# Altium PCB RelayBoard-multi.PcbDoc
Units mm, origin at the board's own origin, x right, y up, seen from the top; angles counter-clockwise.
Board outline 156 x 231 mm, 4 copper layers (Top Layer, Mid-Layer 1, Mid-Layer 2, Bottom Layer); 66 components, 77 nets, 264 pads, 9 vias.
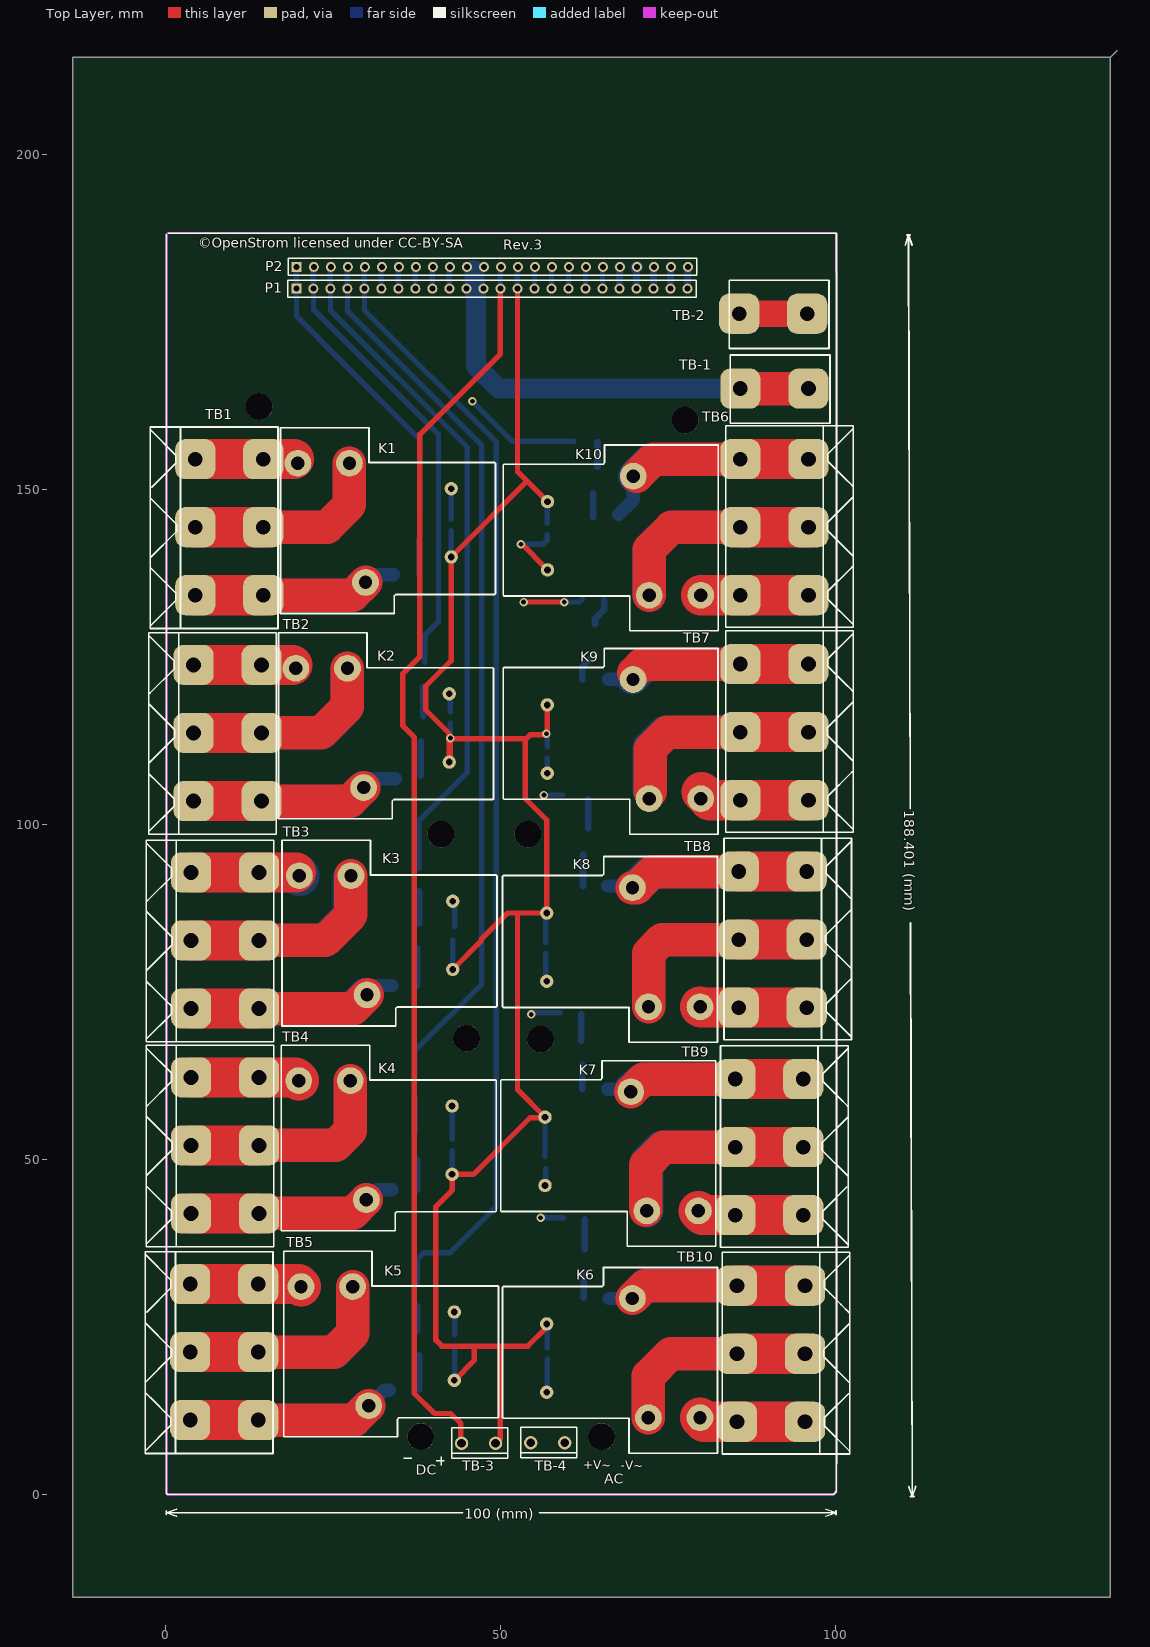
[diagram p0: Top Layer view]
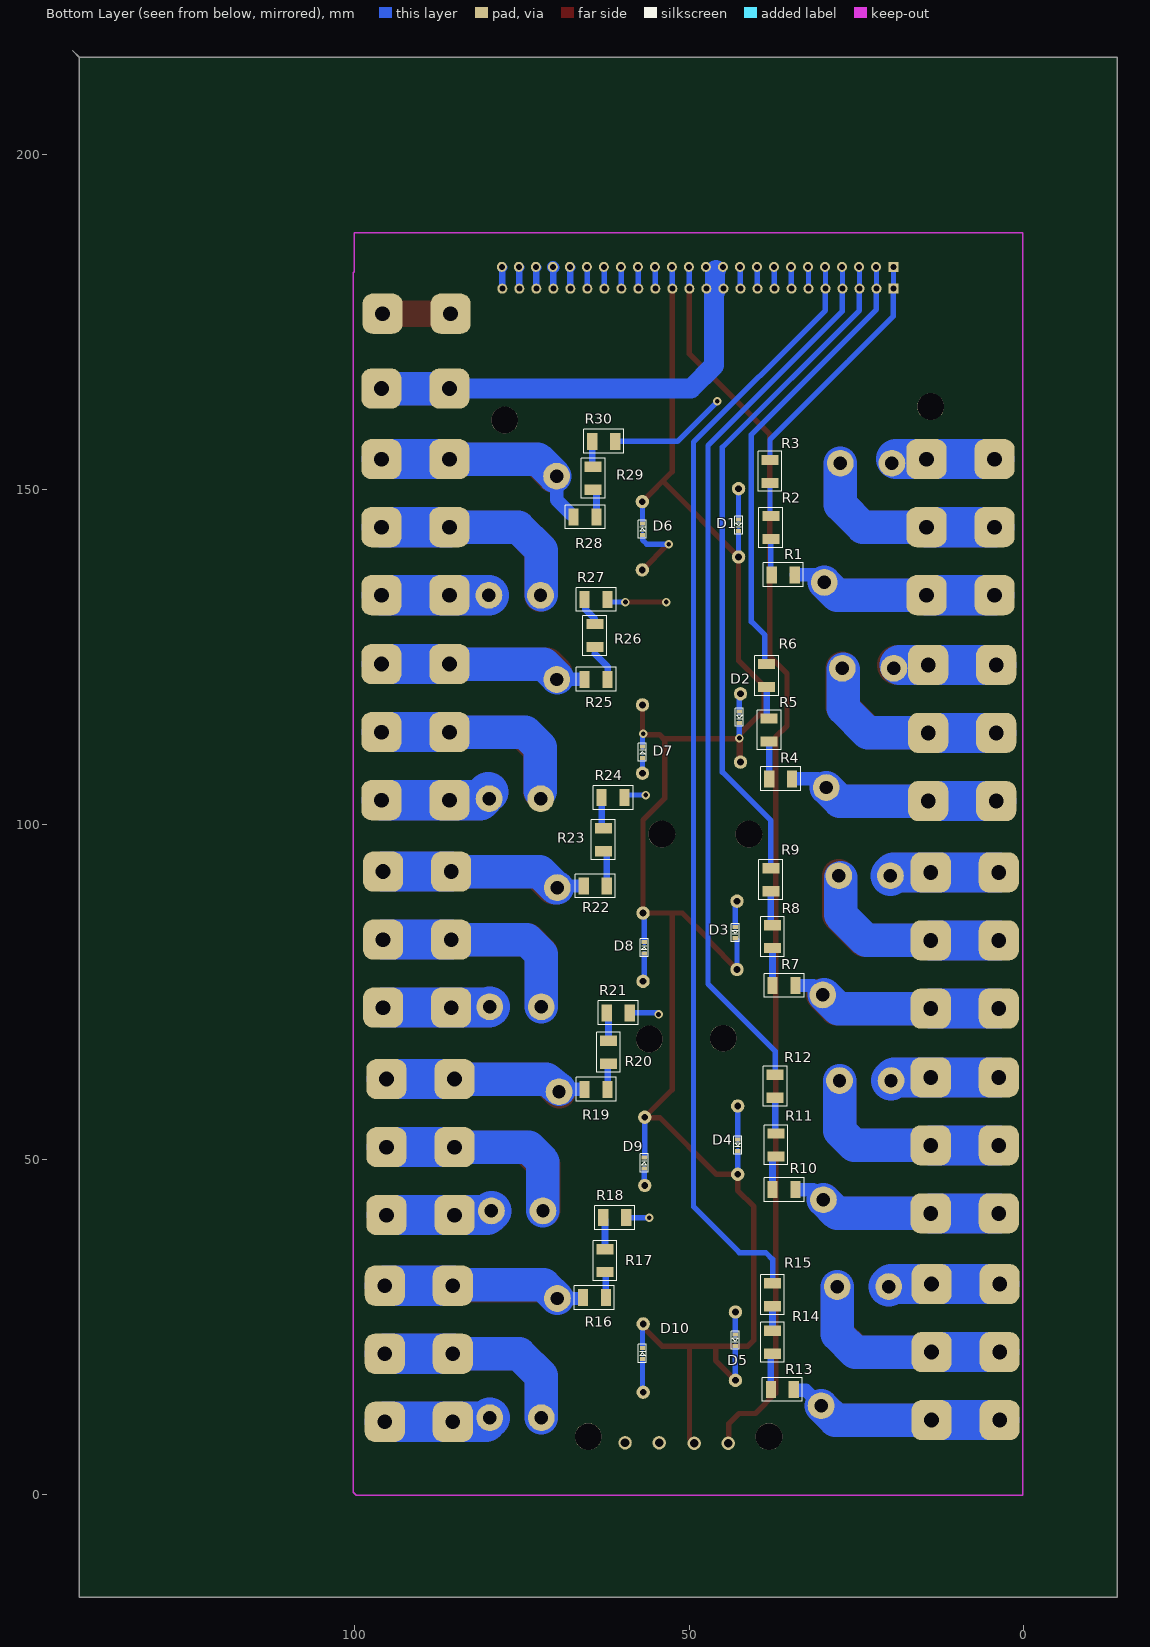
[diagram p1: Bottom Layer view, seen from below]
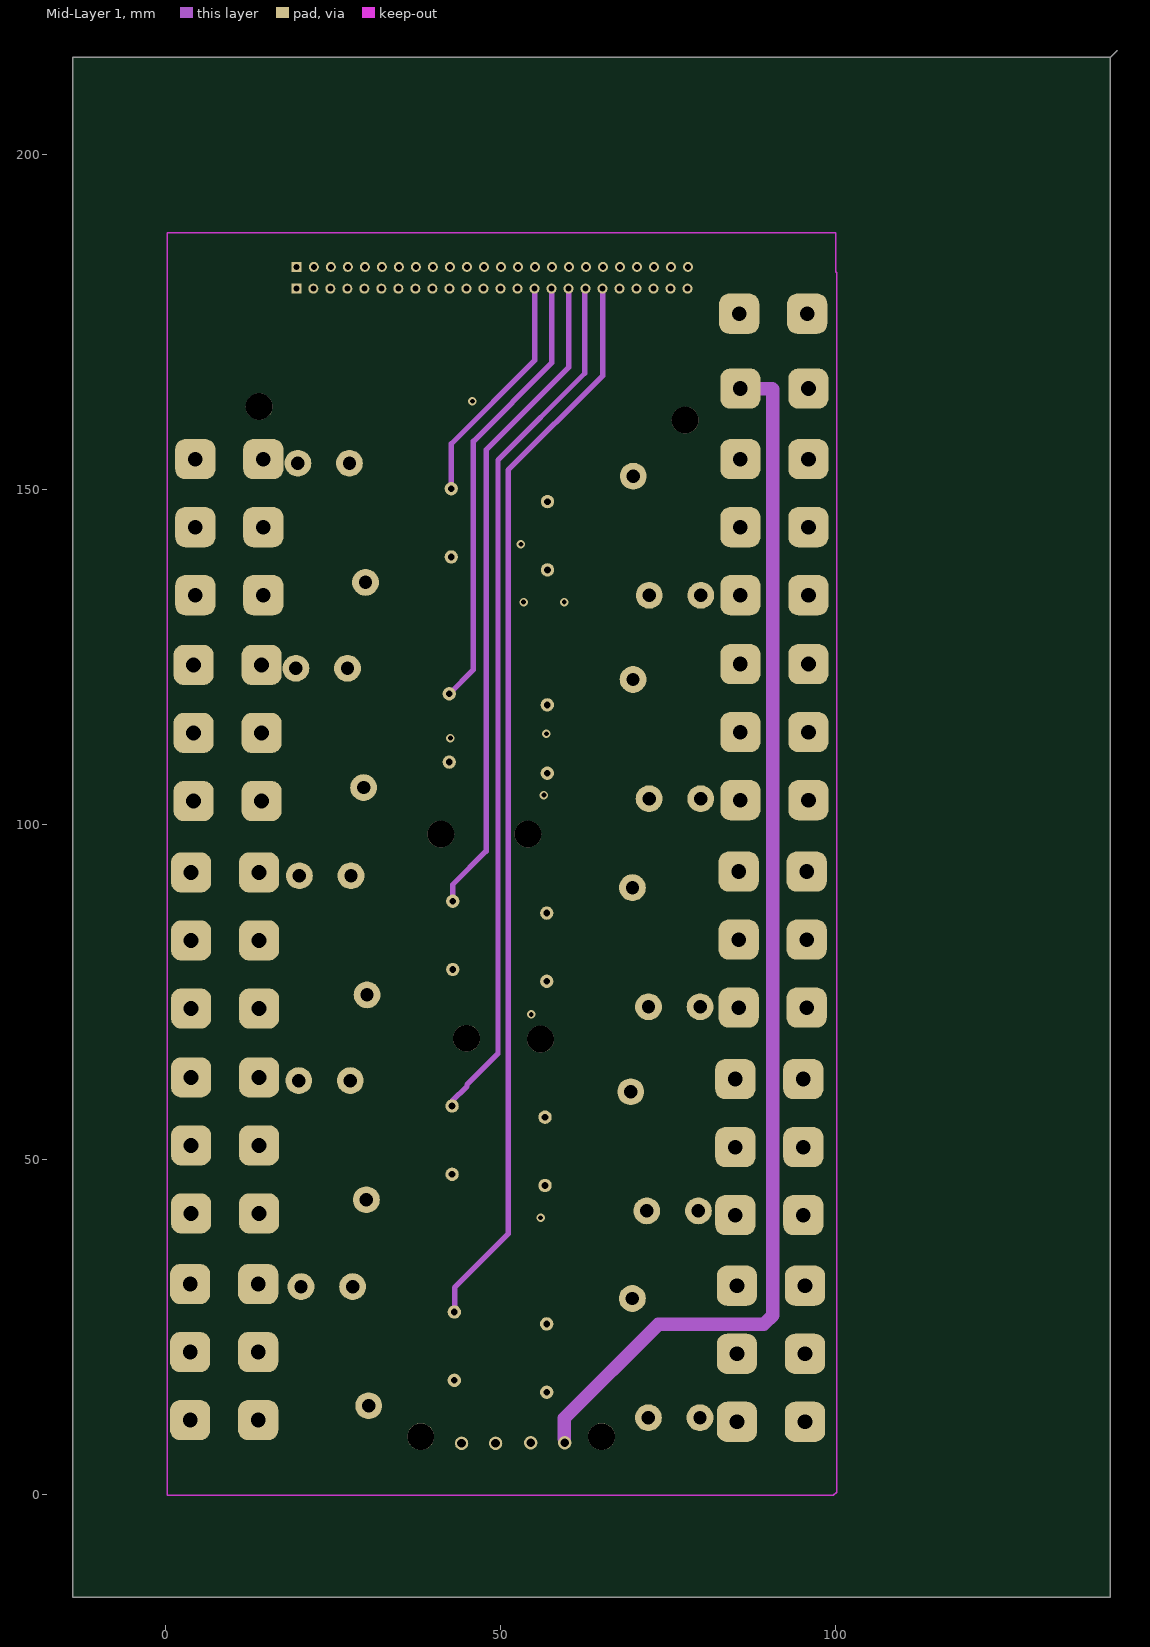
[diagram p2: Mid-Layer 1]
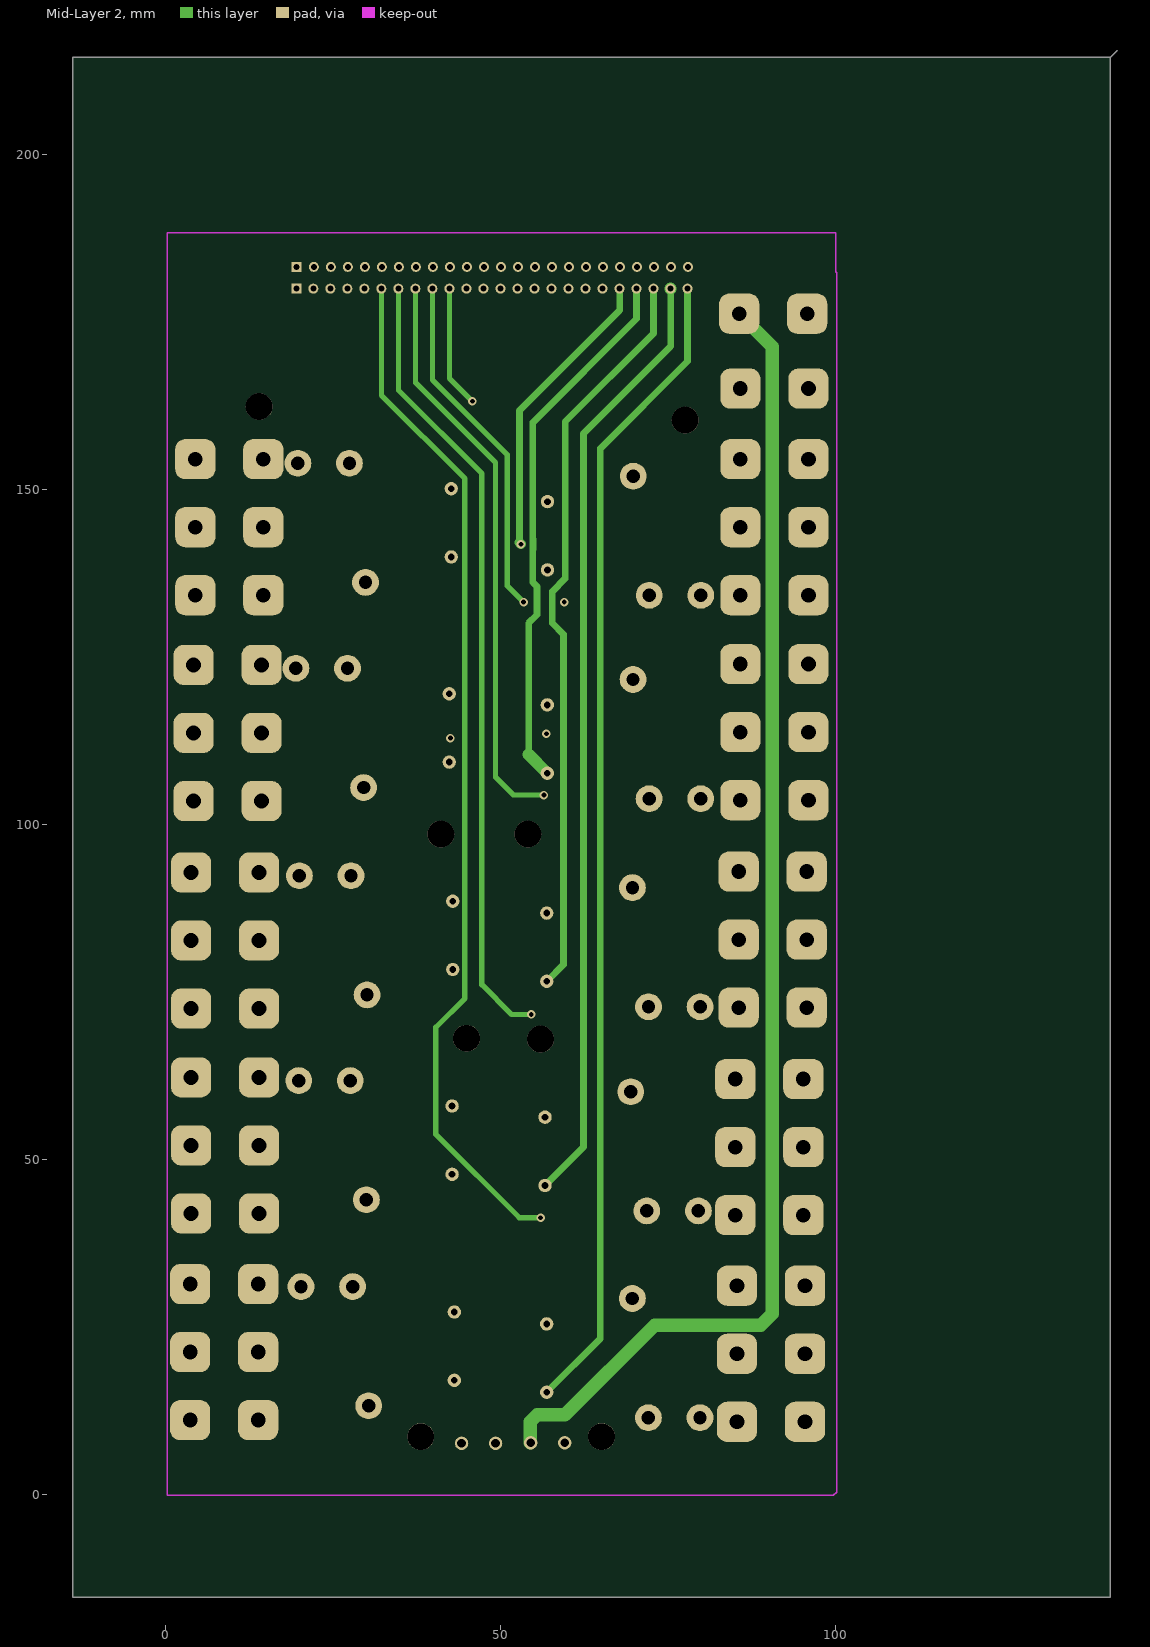
[diagram p3: Mid-Layer 2]

## Layer stack, top to bottom
Top Layer: signal copper 0.0356
Dielectric: core 0.32, FR-4, Dk 4.8
Mid-Layer 1: signal copper 0.0356
Dielectric: prepreg 0.32, FR-4, Dk 4.8
Mid-Layer 2: signal copper 0.0356
Dielectric: core 0.32, FR-4, Dk 4.8
Bottom Layer: signal copper 0.0356

## Board outline
-13.94,-15.414 -13.94,214.586 141.06,214.586 142.06,215.586 141.06,214.586 141.06,-15.414

## Design rules (kind name [scope] priority, off if disabled: settings)
Clearance [All] p1: gap=0.254
PolygonConnect [All] p1: connectstyle=Relief reliefconductorwidth=0.254 reliefentries=4 polygonreliefangle="90 Angle" airgapwidth=0.254
RoutingVias [All] p1: holewidth=0.711 width=1.27 viastyle="Through Hole" minholewidth=0.711 minwidth=1.27 maxholewidth=0.711 maxwidth=1.27
SilkToSilkClearance [All] p1 off: silktosilkclearance=0.254
SilkToSolderMaskClearance [IsPad] p1 off: minsilkscreentomaskgap=0.254 clearancetoexposedcopper=TRUE
SolderMaskExpansion [All] p1: expansion=0.102
Width [All] p1: maxlimit=10 minlimit=0.254 preferedwidth=0.254
26 further rules are at their usual default settings.

## Classes and differential pairs
component class RelayBoard-multi: D1 D2 D3 D4 D5 D6 D7 D8 D9 D10 K1 K2 K3 K4 K5 K6 K7 K8 K9 K10 P1 R1 R2 R3 R4 R5 R6 R7 R8 R9 R10 R11 R12 R13 R14 R15 R16 R17 R18 R19 R20 R21 R22 R23 R24 R25 R26 R27 R28 R29 R30 TB1 TB2 TB3 TB4 TB5 TB6 TB7 TB8 TB9 TB10 TB-1

## Components (designator, comment, footprint, x,y, rotation, side; value= is the part's Value field where it differs from the comment)
D1 "1N4148" SOD523 42.605,143.856 r90 bottom
D2 "1N4148" SOD523 42.478,115.154 r90 bottom
D3 "1N4148" SOD523 43.113,83.023 r90 bottom
D4 "1N4148" SOD523 42.732,51.273 r90 bottom
D5 "1N4148" SOD523 43.113,22.112 r90 bottom
D6 "1N4148" SOD523 56.956,144.97 r270 bottom
D7 "1N4148" SOD523 56.956,111.647 r270 bottom
D8 "1N4148" SOD523 56.702,82.437 r270 bottom
D9 "1N4148" SOD523 56.702,50.306 r270 bottom
D10 "1N4148" SOD523 56.956,21.858 r270 bottom
K1 "Relay-SPDT" "Relay BT90 - duplicate" 29.805,136.168 r90 top
K2 "Relay-SPDT" "Relay BT90 - duplicate" 29.511,105.531 r90 top
K3 "Relay-SPDT" "Relay BT90 - duplicate" 30.032,74.563 r90 top
K4 "Relay-SPDT" "Relay BT90 - duplicate" 29.932,43.966 r90 top
K5 "Relay-SPDT" "Relay BT90 - duplicate" 30.273,13.202 r90 top
K6 "Relay-SPDT" "Relay BT90 - duplicate" 69.656,29.224 r270 top (schematic designator K10)
K7 "Relay-SPDT" "Relay BT90 - duplicate" 69.415,60.105 r270 top (schematic designator K9)
K8 "Relay-SPDT" "Relay BT90 - duplicate" 69.669,90.585 r270 top
K9 "Relay-SPDT" "Relay BT90 - duplicate" 69.756,121.67 r270 top (schematic designator K7)
K10 "Relay-SPDT" "Relay BT90 - duplicate" 69.783,152.033 r270 top (schematic designator K6)
P1 "Header 24" HDR1X24#1 19.47,180.036 r0 top
P2 "Header 24" HDR1X24#2 19.545,183.286 r0 top (schematic designator P1)
R1 "270K/5%/.5" 1210C-GENERIC 37.652,137.301 r180 bottom
R2 "270K/5%/.5" 1210C-GENERIC 37.779,146.064 r270 bottom
R3 "270K/5%/.5" 1210C-GENERIC 37.906,154.446 r270 bottom
R4 "270K/5%/.5" 1210C-GENERIC 38.033,106.821 r180 bottom
R5 "270K/5%/.5" 1210C-GENERIC 38.033,115.838 r270 bottom
R6 "270K/5%/.5" 1210C-GENERIC 38.414,123.966 r270 bottom
R7 "270K/5%/.5" 1210C-GENERIC 37.525,75.96 r180 bottom
R8 "270K/5%/.5" 1210C-GENERIC 37.525,84.977 r270 bottom
R9 "270K/5%/.5" 1210C-GENERIC 37.779,93.486 r270 bottom
R10 "270K/5%/.5" 1210C-GENERIC 37.525,45.48 r180 bottom
R11 "270K/5%/.5" 1210C-GENERIC 37.017,53.862 r270 bottom
R12 "270K/5%/.5" 1210C-GENERIC 37.144,62.625 r270 bottom
R13 "270K/5%/.5" 1210C-GENERIC 37.779,15.635 r180 bottom
R14 "270K/5%/.5" 1210C-GENERIC 37.525,24.398 r270 bottom
R15 "270K/5%/.5" 1210C-GENERIC 37.525,31.51 r270 bottom
R16 "270K/5%/.5" 1210C-GENERIC 62.417,29.351 r0 bottom (schematic designator R28)
R17 "270K/5%/.5" 1210C-GENERIC 62.544,36.59 r270 bottom (schematic designator R29)
R18 "270K/5%/.5" 1210C-GENERIC 59.369,41.289 r0 bottom (schematic designator R30)
R19 "270K/5%/.5" 1210C-GENERIC 62.163,60.466 r0 bottom (schematic designator R25)
R20 "270K/5%/.5" 1210C-GENERIC 62.036,67.705 r270 bottom (schematic designator R26)
R21 "270K/5%/.5" 1210C-GENERIC 58.861,71.896 r0 bottom (schematic designator R27)
R22 "270K/5%/.5" 1210C-GENERIC 62.29,90.819 r0 bottom
R23 "270K/5%/.5" 1210C-GENERIC 62.798,99.455 r270 bottom
R24 "270K/5%/.5" 1210C-GENERIC 59.623,104.027 r0 bottom
R25 "270K/5%/.5" 1210C-GENERIC 62.163,121.68 r0 bottom (schematic designator R19)
R26 "270K/5%/.5" 1210C-GENERIC 64.068,129.935 r270 bottom (schematic designator R20)
R27 "270K/5%/.5" 1210C-GENERIC 62.163,133.618 r0 bottom (schematic designator R21)
R28 "270K/5%/.5" 1210C-GENERIC 63.814,145.937 r0 bottom (schematic designator R16)
R29 "270K/5%/.5" 1210C-GENERIC 64.322,153.43 r270 bottom (schematic designator R17)
R30 "270K/5%/.5" 1210C-GENERIC 61.02,157.24 r0 bottom (schematic designator R18)
TB1 "DG135-3" DG135-1 4.378,154.573 r270 top
TB2 "DG135-3" DG135-1 4.124,123.839 r270 top
TB3 "DG135-3" DG135-1 3.743,92.851 r270 top
TB4 "DG135-3" DG135-1 3.743,62.244 r270 top
TB5 "DG135-3" DG135-1 3.616,31.383 r270 top
TB6 "DG135-3" DG135-1 95.945,134.253 r90 top
TB7 "DG135-3" DG135-1 95.945,103.646 r90 top
TB8 "DG135-3" DG135-1 95.691,72.658 r90 top
TB9 "DG135-3" DG135-1 95.183,41.67 r90 top
TB10 "DG135-3" DG135-1 95.437,10.809 r90 top
TB-1 "DG135-1" DG135-0 85.785,165.114 r0 top
TB-2 "DG135-1" DG135-0 85.61,176.289 r0 top (schematic designator TB-1)
TB-3 "Comment" "TermBlock 2.54 2P" 44.15,7.6 r0 top
TB-4 "Comment" "TermBlock 2.54 2P" 54.47,7.675 r0 top

## Footprints (in the part's own frame and the unit in brackets; to place one, negate y for a bottom-side part, rotate by r counter-clockwise, add the part's x,y. Pads: shape width x height; smd on the part's side, far side on the other; paste and mask are expansions set on the pad)
1210C-GENERIC [mil]
  rect 60x100 smd: 1(0,0) 2(135,0)
  silkscreen extent -50,-70 185,70, body extent -10,-50 145,50, height 46
DG135-0 [mm]
  rrect50% 6x6 hole 2.2: 1(0,0) 2(10.16,0)
  silkscreen extent -1.5,-5.2 13.4,5
DG135-1 [mm]
  rrect50% 6x6 hole 2.2: 1(0,10.16) 1(0,0) 2(10.16,10.16) 2(10.16,0) 3(20.32,10.16) 3(20.32,0)
  silkscreen extent -4.8,-6.7 25.3,12.36
HDR1X24#1 [mm] "Connector; Header; 24 Position"
  rect 1.5x1.5 hole 0.9: 1(0,0)
  round 1.5 hole 0.9: 2(2.54,0) 3(5.08,0) 4(7.62,0) 5(10.16,0) 6(12.7,0) 7(15.24,0) 8(17.78,0) 9(20.32,0) 10(22.86,0) 11(25.4,0) 12(27.94,0) 13(30.48,0) 14(33.02,0) 15(35.56,0) 16(38.1,0) 17(40.64,0) 18(43.18,0) 19(45.72,0) 20(48.26,0) 21(50.8,0) 22(53.34,0) 23(55.88,0) 24(58.42,0)
  silkscreen extent -1.27,-1.27 59.69,1.27
HDR1X24#2 [mm] "Connector; Header; 24 Position"
  rect 1.5x1.5 hole 0.9: 1(-0.075,0)
  round 1.5 hole 0.9: 2(2.54,0) 3(5.08,0) 4(7.62,0) 5(10.16,0) 6(12.7,0) 7(15.24,0) 8(17.78,0) 9(20.32,0) 10(22.86,0) 11(25.4,0) 12(27.94,0) 13(30.48,0) 14(33.02,0) 15(35.56,0) 16(38.1,0) 17(40.64,0) 18(43.18,0) 19(45.72,0) 20(48.26,0) 21(50.8,0) 22(53.34,0) 23(55.88,0) 24(58.42,0)
  silkscreen extent -1.27,-1.27 59.69,1.27
"Relay BT90 - duplicate" [mm]
  round 2 hole 1: 1(3.8,-12.8) 2(14,-12.8)
  round 4 hole 2: 3(17.8,10.1) 4(0,0) 5(17.8,2.4)
  round 0 all layers, no hole: 6(8.9,-15.2)
  silkscreen extent -4.64,-19.4 23.1,12.7
SOD523 [mm]
  rect 0.6x0.8 smd: A(1.7,0) K(0,0)
  silkscreen extent -0.5,-0.6 2.2,0.6, body extent -0.05,-0.53 1.75,0.55, height 0.53
"TermBlock 2.54 2P" [mm]
  round 2 hole 1.3: 1(0,0) 2(5.08,0)
  silkscreen extent -1.5,-2.2 6.9,2.3

## Part data
D1 D2 D3 D5 D6 D7 D8 D9 D10: library part 1N4001, "1N4001"
D4: library part 1N4001
K1 K2 K3 K4 K5 K6 K7 K8 K9 K10: "Single-Pole Dual-Throw Relay"
P1 P2: "Header, 24-Pin"
R1 R2 R3 R4 R5 R6 R7 R8 R9 R10 R11 R12 R13 R14 R15 R16 R17 R18 R19 R20 R21 R22 R23 R24 R25 R26 R27 R28 R29 R30: library part Res3, "Resistor"
TB1 TB2 TB3 TB4 TB5 TB6 TB7 TB8 TB9 TB10: library part "Header 3", "Header, 3-Pin"
TB-1 TB-2: library part Socket, "Socket"

## Free pads (board coordinates)
  round 4 hole 4: 2(13.917,162.425) 2(38.06,8.586) 2(41.06,98.586) 2(44.891,68.086) 2(54.06,98.586) 2(55.94,67.959) 2(65.06,8.586) 2(77.53,160.415)

## Via types
v1: diameter 1.27, hole 0.711, Top Layer to Bottom Layer, 9 vias

## Nets (pads, with @x,y where several pads share a name; then routed paths per layer and width w, separated by ;. In a path a pad name is that pad's centre, name@x,y a point inside that pad or via, vN(x,y) a via of type N, cw(c..) or ccw(c..) an arc to the next point about the centre after c; other vN are vias at no path point)
GND: P1.13 P2.13 TB-3.1 | length 186.8
  Top Layer w0.8: TB-3.1@44.045,7.6 44.045,10.53 42.525,12.05 40.1,12.05 37.075,15.075 37.075,113.05 35.375,114.75 35.375,122.55 37.925,125.1 37.925,158.275 49.95,170.3 P1.13
  Bottom Layer w0.8: P1.13 49.95,183.211 P2.13
Net3: K9.4 R25.2 TB7.3 | length 58.7
  Top Layer w5: K9.4@69.883,122.686 71.163,123.966 TB7.3@85.785,123.966
  Top Layer w6: TB7.3@85.785,123.966 TB7.3@95.945,123.966
  Bottom Layer w2: R25.2@66.1,121.68 69.746,121.68 K9.4 ; K9.4@68.386,121.934 K9.4@69.656,121.934
  Bottom Layer w5: K9.4@69.656,121.934 71.688,123.966 TB7.3@85.785,123.966
  Bottom Layer w6: TB7.3@85.785,123.966 TB7.3@95.945,123.966
Net4: K9.3 TB7.1 | length 33
  Top Layer w6: K9.3@79.983,104.886 81.223,103.646 85.785,103.646 TB7.1@95.945,103.646
  Bottom Layer w6: K9.3@79.983,104.886 81.223,103.646 85.785,103.646 TB7.1@95.945,103.646
Net5: R26.1 R27.2 | length 4.1
  Bottom Layer w1: R26.1 64.068,130.697 65.465,132.094 R27.2@65.465,133.491
NetD1_A: D1.A K1.2 P1.15 P2.15 | length 43.3
  Top Layer w0.8: K1.2@42.351,149.914 K1.2
  Mid-Layer 1 w0.8: K1.2 42.605,156.859 55.051,169.305 55.051,180.015 P1.15
  Bottom Layer w0.8: D1.A K1.2 ; P1.15 55.03,183.211 P2.15
NetD1_K: D1.K D2.K D3.K D4.K D5.K D6.K D7.K D8.K D9.K D10.K K1.1 K2.1 K3.1 K4.1 K5.1 K6.1 K7.1 K8.1 K9.1 K10.1 P1.14 P2.14 TB-3.2 | length 310.4
  Top Layer w0.8: K2.1 42.311,113.585 38.795,117.101 38.795,120.664 42.605,124.474 K1.1 ; K1.1@42.351,140.222 K1.1 ; K2.1@42.478,109.498 v1@42.478,112.839 ; v1(42.478,112.917) v1@42.478,112.839 ; K3.1 47.05,82.581 ; K5.1 46.034,19.963 46.034,22.112 ; 43.073,22.072 43.113,22.112 ; 47.05,82.818 51.017,86.785 52.511,86.785 ; TB-3.2@49.925,8.295 49.925,22.112 ; P1.14 52.511,180.015 52.511,152.705 K10.1 ; v1@56.829,113.425 54.416,113.425 53.83,112.839 ; K6.1@56.956,25.033 54.035,22.112 49.925,22.112 ; v1@56.956,113.552 K9.1 ; K10.1@56.956,148.206 K10.1 ; v1@42.478,112.839 53.83,112.839 ; K1.1 53.927,151.29 K10.1 ; 43.113,22.112 41.208,22.112 40.319,23.001 40.319,42.94 42.732,45.353 K4.1 45.907,47.766 54.359,56.218 56.702,56.218 52.511,60.409 52.511,86.785 ; 43.113,22.112 46.034,22.112 ; 46.034,22.112 49.925,22.112 ; 52.511,86.785 K8.1 56.869,100.685 53.654,103.9 53.654,112.663 53.83,112.839
  Bottom Layer w0.8: v1(42.478,112.917) D2.K ; K1.1 D1.K ; K4.1 D4.K ; K3.1 D3.K@42.832,82.742 ; K5.1@43.113,17.042 D5.K ; P1.14 52.49,183.211 P2.14 ; D9.K@56.615,50.393 K7.1 ; D8.K K8.1@56.702,86.618 ; v1(56.829,113.552) 56.956,113.425 D7.K ; D10.K K6.1@56.956,25.324 ; D6.K K10.1@56.956,148.206
NetD2_A: D2.A K2.2 P1.16 P2.16 | length 72.7
  Top Layer w0.8: K2.2 K2.2@42.351,119.491
  Mid-Layer 1 w0.8: K2.2 45.907,123.127 45.907,157.24 57.591,168.924 57.591,180.015 P1.16
  Bottom Layer w0.8: D2.A K2.2@42.478,119.364 ; P1.16 57.57,183.211 P2.16
NetD3_A: D3.A K3.2 P1.17 P2.17 | length 105.7
  Top Layer w0.8: K3.2 K3.2@42.986,88.409
  Mid-Layer 1 w0.8: K3.2 42.832,91.046 47.812,96.026 47.812,155.97 60.131,168.289 60.131,180.015 P1.17
  Bottom Layer w0.8: D3.A K3.2@43.113,88.282 ; P1.17 60.11,183.211 P2.17
NetD4_A: D4.A K4.2 P1.18 P2.18 | length 138.8
  Top Layer w0.8: K4.2@42.605,57.839 K4.2
  Mid-Layer 1 w0.8: K4.2 42.732,58.688 44.954,60.911 44.954,61.165 49.59,65.8 49.59,154.446 62.544,167.4 62.544,179.93 P1.18
  Bottom Layer w0.8: D4.A K4.2 ; P1.18 62.65,183.211 P2.18
NetD5_A: D5.A K5.2 P1.19 P2.19 | length 168.7
  Top Layer w0.8: K5.2 K5.2@43.113,27.162
  Mid-Layer 1 w0.8: K5.2 43.113,27.242 43.113,30.875 51.114,38.876 51.114,152.922 65.211,167.019 65.211,180.015 P1.19
  Bottom Layer w0.8: D5.A K5.2@43.113,27.162 ; P1.19 65.19,183.211 P2.19
NetD6_A: D6.A K10.2 P1.20 P2.20 | length 58.3
  Top Layer w0.8: v1(53.019,141.873) 53.143,141.873 K10.2
  Mid-Layer 2 w0.8: P1.20 P1.20@67.751,180.015
  Mid-Layer 2 w1: v1@52.8,142.092 52.8,161.847 67.751,176.798 P1.20@67.751,180.015
  Mid-Layer 2 w1.5: v1@52.8,142.092 v1(53.019,141.873)
  Bottom Layer w0.8: v1(53.019,141.873) 56.321,141.873 56.956,142.508 D6.A
  Bottom Layer w1: P1.20 P2.20@67.73,183.211
  Bottom Layer w1.5: P2.20@67.73,183.211 P2.20
NetD7_A: D7.A K9.2 P1.21 P2.21 | length 86.2
  Mid-Layer 2 w1: 54.162,110.464 54.162,130.084 55.41,131.332 55.41,135.561 54.835,136.136 ; 54.797,136.174 54.797,141.121 ; 54.797,142.625 54.797,160.072 70.27,175.545 P1.21 ; 54.808,141.132 54.808,142.614
  Mid-Layer 2 w1.8: 54.162,110.464 K9.2
  Bottom Layer w0.8: K9.2 D7.A
  Bottom Layer w1: P1.21 P2.21@70.27,183.211
  Bottom Layer w1.8: P2.21@70.27,183.211 P2.21
NetD8_A: D8.A K8.2 P1.22 P2.22 | length 118.8
  Top Layer w0.8: K8.2@56.829,76.625 K8.2
  Mid-Layer 2 w1: K8.2 59.369,79.085 59.369,128.411 57.707,130.073 57.707,134.807 59.623,136.723 59.623,160.161 72.81,173.348 P1.22
  Bottom Layer w0.8: K8.2@56.702,76.752 D8.A
  Bottom Layer w1: P1.22 P2.22@72.81,183.211
  Bottom Layer w1.5: P2.22@72.81,183.211 P2.22
NetD9_A: D9.A K7.2 P1.23 P2.23 | length 147.5
  Mid-Layer 2 w1: K7.2 62.35,51.84 62.35,158.4 75.371,171.421 P1.23@75.371,180.015
  Mid-Layer 2 w1.8: P1.23 P1.23@75.371,180.015
  Bottom Layer w0.8: K7.2 56.702,46.192 D9.A
  Bottom Layer w1: P1.23 P2.23@75.35,183.211
  Bottom Layer w1.5: P2.23@75.35,183.211 P2.23
NetD10_A: D10.A K6.2 P1.24 P2.24 | length 181.8
  Top Layer w0.8: K6.2 K6.2@56.956,15.324
  Mid-Layer 2 w1: K6.2 64.875,23.243 64.875,156.175 77.89,169.19 P1.24
  Bottom Layer w0.8: K6.2@56.956,15.324 D10.A
  Bottom Layer w1: P1.24 P2.24@77.89,183.211
  Bottom Layer w1.5: P2.24@77.89,183.211 P2.24
NetK1_3: K1.3 TB1.1 | length 29.4
  Top Layer w6: TB1.1@4.378,154.573 14.538,154.573 K1.3@19.1,154.573
  Bottom Layer w6: TB1.1@4.378,154.573 14.538,154.573 K1.3@19.1,154.573
NetK1_4: K1.4 R1.2 TB1.3 | length 55.5
  Top Layer w5: TB1.3@14.538,134.253 27.89,134.253 K1.4
  Top Layer w6: TB1.3@4.378,134.253 TB1.3@14.538,134.253
  Bottom Layer w2: K1.4@30.938,137.301 R1.2@33.969,137.301
  Bottom Layer w5: TB1.3@14.538,134.253 27.89,134.253 K1.4
  Bottom Layer w6: TB1.3@4.378,134.253 TB1.3@14.538,134.253
NetK1_5: K1.5 TB1.2 | length 61.2
  Top Layer w5: TB1.2@14.538,144.413 24.063,144.413 27.405,147.755 K1.5
  Top Layer w6: TB1.2@4.378,144.413 TB1.2@14.538,144.413
  Bottom Layer w5: TB1.2@14.538,144.413 24.063,144.413 27.405,147.755 K1.5
  Bottom Layer w6: TB1.2@4.378,144.413 TB1.2@14.538,144.413
NetK2_3: K2.3 TB2.1 | length 29.2
  Top Layer w6: TB2.1@4.124,123.839 14.284,123.839 K2.3@18.903,123.839
  Bottom Layer w6: TB2.1@4.124,123.839 14.284,123.839 K2.3@18.555,123.839
NetK2_4: K2.4 R4.2 TB2.3 | length 57.7
  Top Layer w5: TB2.3@14.284,103.519 27.499,103.519 K2.4
  Top Layer w6: TB2.3@4.124,103.519 TB2.3@14.284,103.519
  Bottom Layer w1: K2.4 K2.4@30.801,106.821
  Bottom Layer w2: K2.4@30.801,106.821 R4.2@34.223,106.821
  Bottom Layer w5: TB2.3@14.284,103.519 27.499,103.519 K2.4
  Bottom Layer w6: TB2.3@4.124,103.519 TB2.3@14.284,103.519
NetK2_5: K2.5 TB2.2 | length 60.6
  Top Layer w5: TB2.2@14.284,113.679 23.174,113.679 27.111,117.616 K2.5
  Top Layer w6: TB2.2@4.124,113.679 TB2.2@14.284,113.679
  Bottom Layer w5: TB2.2@14.284,113.679 23.301,113.679 26.984,117.362 K2.5@26.984,123.204
  Bottom Layer w6: TB2.2@4.124,113.679 TB2.2@14.284,113.679
NetK3_3: K3.3 TB3.1 | length 32.1
  Top Layer w6: TB3.1@3.743,92.851 13.903,92.851 K3.3@19.444,92.851
  Bottom Layer w6: TB3.1@3.743,92.851 13.903,92.851 19.444,92.851 K3.3
NetK3_4: K3.4 R7.2 TB3.3 | length 58.3
  Top Layer w5: TB3.3@13.903,72.531 28,72.531 K3.4
  Top Layer w6: TB3.3@3.743,72.531 TB3.3@13.903,72.531
  Bottom Layer w1: K3.4 K3.4@31.429,75.96
  Bottom Layer w2: K3.4@31.429,75.96 R7.2@33.715,75.96
  Bottom Layer w5: TB3.3@13.903,72.531 27.746,72.531 K3.4@29.778,74.563
  Bottom Layer w6: TB3.3@3.743,72.531 TB3.3@13.903,72.531
NetK3_5: K3.5 TB3.2 | length 62.1
  Top Layer w5: TB3.2@13.903,82.691 23.809,82.691 27.632,86.514 K3.5
  Top Layer w6: TB3.2@3.743,82.691 TB3.2@13.903,82.691
  Bottom Layer w5: TB3.2@13.903,82.691 23.555,82.691 27.365,86.501 K3.5@27.365,92.096
  Bottom Layer w6: TB3.2@3.743,82.691 TB3.2@13.903,82.691
NetK4_3: K4.3 TB4.1 | length 32.6
  Top Layer w6: TB4.1@3.743,62.244 13.903,62.244 19.354,62.244 K4.3
  Bottom Layer w6: TB4.1@3.743,62.244 13.903,62.244 19.354,62.244 K4.3
NetK4_4: K4.4 R10.2 TB4.3 | length 58.5
  Top Layer w5: TB4.3@13.903,41.924 27.873,41.924 29.915,43.966 K4.4
  Top Layer w6: TB4.3@3.743,41.924 TB4.3@13.903,41.924
  Bottom Layer w1: K4.4 31.446,45.48
  Bottom Layer w2: 31.446,45.48 R10.2@33.715,45.48
  Bottom Layer w5: TB4.3@13.903,41.924 27.89,41.924 K4.4
  Bottom Layer w6: TB4.3@3.743,41.924 TB4.3@13.903,41.924
NetK4_5: K4.5 TB4.2 | length 64.4
  Top Layer w4.2: K4.5@27.492,61.726 K4.5
  Top Layer w5: TB4.2@13.903,52.084 25.333,52.084 27.492,54.243 K4.5@27.492,61.726
  Top Layer w6: TB4.2@3.743,52.084 TB4.2@13.903,52.084
  Bottom Layer w4.2: K4.5@27.492,61.726 K4.5
  Bottom Layer w5: TB4.2@13.903,52.084 25.333,52.084 27.492,54.243 K4.5@27.492,61.726
  Bottom Layer w6: TB4.2@3.743,52.084 TB4.2@13.903,52.084
NetK5_3: K5.3 TB5.1 | length 33.4
  Top Layer w6: TB5.1@3.616,31.383 13.776,31.383 19.792,31.383 K5.3
  Bottom Layer w6: TB5.1@3.616,31.383 13.776,31.383 19.792,31.383 K5.3
NetK5_4: K5.4 R13.2 TB5.3 | length 59.1
  Top Layer w5: TB5.3@13.776,11.063 28.134,11.063 K5.4
  Top Layer w6: TB5.3@3.616,11.063 TB5.3@13.776,11.063
  Bottom Layer w2: K5.4 32.579,15.508 33.334,15.508
  Bottom Layer w5: TB5.3@13.776,11.063 28.134,11.063 K5.4
  Bottom Layer w6: TB5.3@3.616,11.063 TB5.3@13.776,11.063
NetK5_5: K5.5 TB5.2 | length 64.9
  Top Layer w5: TB5.2@13.776,21.223 25.079,21.223 27.873,24.017 K5.5
  Top Layer w6: TB5.2@3.616,21.223 TB5.2@13.776,21.223
  Bottom Layer w5: TB5.2@13.776,21.223 25.206,21.223 27.873,23.89 K5.5
  Bottom Layer w6: TB5.2@3.616,21.223 TB5.2@13.776,21.223
NetK6_3: K10.3 TB6.1 | length 32.1
  Top Layer w6: K10.3@79.903,134.253 85.785,134.253 TB6.1@95.945,134.253
  Bottom Layer w6: K10.3 79.903,134.253 85.785,134.253 TB6.1@95.945,134.253
NetK6_4: K10.4 R28.2 TB6.3 | length 60.3
  Top Layer w5: K10.4@70.291,152.033 72.831,154.573 TB6.3@85.785,154.573
  Top Layer w6: TB6.3@85.785,154.573 TB6.3@95.945,154.573
  Bottom Layer w2: R28.2@67.624,146.318 69.783,148.477 K10.4
  Bottom Layer w5: K10.4@70.037,152.033 72.577,154.573 TB6.3@85.785,154.573
  Bottom Layer w6: TB6.3@85.785,154.573 TB6.3@95.945,154.573
NetK6_5: K10.5 TB6.2 | length 64.1
  Top Layer w5: K10.5 72.183,141.098 75.498,144.413 TB6.2@85.785,144.413
  Top Layer w6: TB6.2@85.785,144.413 TB6.2@95.945,144.413
  Bottom Layer w4.2: K10.5@72.069,134.347 K10.5
  Bottom Layer w5: K10.5@72.069,134.347 72.069,140.984 75.498,144.413 TB6.2@85.785,144.413
  Bottom Layer w6: TB6.2@85.785,144.413 TB6.2@95.945,144.413
NetK7_5: K9.5 TB7.2 | length 62.4
  Top Layer w4.2: K9.5@72.283,104.886 K9.5@72.323,104.926
  Top Layer w5: K9.5@72.323,104.926 72.323,111.266 74.863,113.806 TB7.2@85.785,113.806
  Top Layer w6: TB7.2@85.785,113.806 TB7.2@95.945,113.806
  Bottom Layer w4.2: K9.5@72.196,104.973 K9.5@72.283,104.886
  Bottom Layer w5: K9.5@72.196,104.973 72.196,111.52 74.482,113.806 TB7.2@85.785,113.806
  Bottom Layer w6: TB7.2@85.785,113.806 TB7.2@95.945,113.806
NetK8_3: K8.3 TB8.1 | length 31.9
  Top Layer w6: K8.3 79.896,72.658 85.531,72.658 TB8.1@95.691,72.658
  Bottom Layer w6: K8.3 79.896,72.658 85.531,72.658 TB8.1@95.691,72.658
NetK8_4: K8.4 R22.2 TB8.3 | length 57.5
  Top Layer w5: K8.4 70.311,90.585 72.704,92.978 TB8.3@85.531,92.978
  Top Layer w6: TB8.3@85.531,92.978 TB8.3@95.691,92.978
  Bottom Layer w2: R22.2@65.973,90.819 K8.4@69.435,90.819
  Bottom Layer w5: K8.4 69.93,90.585 72.323,92.978 TB8.3@85.531,92.978
  Bottom Layer w6: TB8.3@85.531,92.978 TB8.3@95.691,92.978
NetK8_5: K8.5 TB8.2 | length 64.9
  Top Layer w5: K8.5 72.069,80.786 74.101,82.818 TB8.2@85.531,82.818
  Top Layer w6: TB8.2@85.531,82.818 TB8.2@95.691,82.818
  Bottom Layer w5: K8.5 72.069,80.659 74.228,82.818 TB8.2@85.531,82.818
  Bottom Layer w6: TB8.2@85.531,82.818 TB8.2@95.691,82.818
NetK9_3: K7.3 TB9.1 | length 31.9
  Top Layer w6: K7.3 80.15,41.67 85.023,41.67 TB9.1@95.183,41.67
  Bottom Layer w6: K7.3 80.15,41.67 85.023,41.67 TB9.1@95.183,41.67
NetK9_4: K7.4 R19.2 TB9.3 | length 56.3
  Top Layer w5: K7.4 71.3,61.99 TB9.3@85.023,61.99
  Top Layer w6: TB9.3@85.023,61.99 TB9.3@95.183,61.99
  Bottom Layer w2: R19.2@65.953,60.486 K7.4@69.415,60.486
  Bottom Layer w5: K7.4@69.415,60.486 71.3,61.99 TB9.3@85.023,61.99
  Bottom Layer w6: TB9.3@85.023,61.99 TB9.3@95.183,61.99
NetK9_5: K7.5 TB9.2 | length 63.1
  Top Layer w4.2: K7.5@71.688,42.432 K7.5
  Top Layer w5: K7.5@71.688,42.432 71.688,49.163 74.355,51.83 TB9.2@85.023,51.83
  Top Layer w6: TB9.2@85.023,51.83 TB9.2@95.183,51.83
  Bottom Layer w5: K7.5 71.815,49.671 73.974,51.83 TB9.2@85.023,51.83
  Bottom Layer w6: TB9.2@85.023,51.83 TB9.2@95.183,51.83
NetK10_3: K6.3 TB10.1 | length 31.9
  Top Layer w6: K6.3 80.371,10.809 85.277,10.809 TB10.1@95.437,10.809
  Bottom Layer w6: K6.3 80.371,10.809 85.277,10.809 TB10.1@95.437,10.809
NetK10_4: K6.4 R16.2 TB10.3 | length 56.7
  Top Layer w5: K6.4 71.561,31.129 TB10.3@85.277,31.129
  Top Layer w6: TB10.3@85.277,31.129 TB10.3@95.437,31.129
  Bottom Layer w2: R16.2@66.227,29.224 K6.4
  Bottom Layer w5: K6.4 71.688,31.256 85.15,31.256 TB10.3@85.277,31.129
  Bottom Layer w6: TB10.3@85.277,31.129 TB10.3@95.437,31.129
NetK10_5: K6.5 TB10.2 | length 62
  Top Layer w5: K6.5 72.056,17.654 75.371,20.969 TB10.2@85.277,20.969
  Top Layer w6: TB10.2@85.277,20.969 TB10.2@95.437,20.969
  Bottom Layer w5: K6.5 72.056,17.654 75.371,20.969 TB10.2@85.277,20.969
  Bottom Layer w6: TB10.2@85.277,20.969 TB10.2@95.437,20.969
NetP1_1: P1.1 P2.1 R3.1 | length 35.9
  Bottom Layer w0.8: P2.1@19.47,183 P1.1 19.491,180.015 19.491,175.934 26.025,169.4 ; 26.241,169.159 37.906,157.494 R3.1
NetP1_2: P1.2 P2.2 R6.1 | length 67.7
  Bottom Layer w0.8: P2.2 22.01,183.211 P1.2 22.031,180.015 22.031,176.925 40.7,158.256 40.7,130.316 38.668,128.284 R6.1@38.668,124.22
NetP1_3: P1.3 P2.3 R9.1 | length 101.3
  Bottom Layer w0.8: P2.3 24.55,183.211 P1.3 24.571,180.015 24.571,176.798 45.018,156.351 45.018,107.837 37.779,100.598 R9.1
NetP1_4: P1.4 P2.4 R12.1 | length 133.2
  Bottom Layer w0.8: P2.4 27.09,183.211 P1.4 27.111,180.015 27.111,176.671 47.177,156.605 47.177,76.214 37.144,66.181 R12.1
NetP1_5: P1.5 P2.5 R15.1 | length 167.2
  Bottom Layer w0.8: P2.5 29.63,183.211 P1.5 29.651,180.015 29.651,176.798 49.336,157.113 49.336,42.94 42.478,36.082 38.541,36.082 37.525,35.066 R15.1
NetP1_6: P1.6 P2.6 R18.1 | length 160.7
  Mid-Layer 2 w0.8: P1.6 32.191,180.015 32.191,164.098 44.637,151.652 44.637,74.055 40.319,69.737 40.319,53.735 52.765,41.289 v1(55.94,41.289)
  Bottom Layer w0.8: P1.6 32.17,183.211 P2.6 ; v1(55.94,41.289) R18.1
NetP1_7: P1.7 P2.7 R21.1 | length 126
  Mid-Layer 2 w0.8: P1.7 34.731,180.015 34.731,164.86 47.177,152.414 47.177,76.087 51.622,71.642 v1(54.543,71.642)
  Bottom Layer w0.8: P1.7 34.71,183.211 P2.7 ; v1(54.543,71.642) 54.797,71.896 R21.1
NetP1_8: P1.8 P2.8 R24.1 | length 92.3
  Mid-Layer 2 w0.8: P1.8 37.271,180.015 37.271,166.003 49.209,154.065 49.209,107.075 51.876,104.408 v1(56.448,104.408)
  Bottom Layer w0.8: P1.8 37.25,183.211 P2.8 ; v1(56.448,104.408) R24.1@59.242,104.408
NetP1_9: P1.9 P2.9 R27.1 | length 64.6
  Top Layer w0.8: v1(53.4,133.237) v1(59.496,133.237)
  Mid-Layer 2 w0.8: P1.9 39.811,180.015 39.811,166.384 50.987,155.208 50.987,135.65 v1(53.4,133.237)
  Bottom Layer w0.8: P1.9 39.79,183.211 P2.9 ; v1(59.496,133.237) 61.782,133.237 R27.1
NetP1_10: P1.10 P2.10 R30.1 | length 39.1
  Mid-Layer 2 w0.8: P1.10 42.351,180.015 42.351,166.638 v1(45.78,163.209)
  Bottom Layer w0.8: P1.10 42.33,183.211 P2.10 ; v1(45.78,163.209) 51.749,157.24 R30.1@60.893,157.24
NetP1_11: P1.11 P1.12 P2.11 P2.12 TB-1.1 TB-1.2 TB-4.2 | length 259.4
  Top Layer w5: TB-1.1 TB-1.2
  Mid-Layer 1 w2: TB-4.2@59.475,8.275 59.475,11.325 73.55,25.4 89.3,25.4 90.65,26.75 90.65,165.025 90.561,165.114 TB-1.1
  Bottom Layer w3: 46,182.825 46.11,182.715 46.11,179.486 46.288,179.308 46.288,168.543 49.717,165.114 TB-1.1
  Bottom Layer w5: TB-1.1 TB-1.2
NetR1_1: R1.1 R2.2 | length 5.2
  Bottom Layer w0.8: R1.1@37.779,137.428 R2.2
NetR2_1: R2.1 R3.2 | length 4.8
  Bottom Layer w0.8: R2.1@37.906,146.191 R3.2
NetR4_1: R4.1 R5.2 | length 5.1
  Bottom Layer w1: R4.1@38.033,107.329 R5.2
NetR5_1: R5.1 R6.2 | length 4.3
  Bottom Layer w1: R5.1@38.414,116.219 R6.2
NetR7_1: R7.1 R8.2 | length 5.6
  Bottom Layer w1: R7.1 R8.2
NetR8_1: R8.1 R9.2 | length 4.8
  Bottom Layer w1: R8.1@37.779,85.231 R9.2
NetR10_1: R10.1 R11.2 | length 4.4
  Bottom Layer w1: R10.1 R11.2@37.525,49.925
NetR13_1: R13.1 R14.2 | length 5.1
  Bottom Layer w1: R13.1 R14.2@37.779,20.715
NetR14_1: R14.1 R15.2 | length 3.7
  Bottom Layer w1: R14.1 R15.2
NetR16_1: R28.1 R29.2 | length 3.6
  Bottom Layer w1: R28.1 R29.2@63.814,149.493
NetR17_1: R29.1 R30.2 | length 3.7
  Bottom Layer w1: R29.1@64.449,153.43 R30.2@64.449,157.113
NetR19_1: R25.1 R26.2 | length 4.6
  Bottom Layer w1: R25.1 62.163,123.585 64.068,125.49
NetR19_2: 
NetR22_1: R22.1 R23.2 | length 4.7
  Bottom Layer w1: R22.1 R23.2@62.29,95.518
NetR23_1: R23.1 R24.2 | length 4.3
  Bottom Layer w1: R23.1@63.052,99.455 R24.2@63.052,103.773
NetR25_1: R19.1 R20.2 | length 3.7
  Bottom Layer w1: R19.1 R20.2@62.163,64.149
NetR28_1: R16.1 R17.2 | length 3.7
  Bottom Layer w1: R16.1 R17.2@62.417,33.034
NetR28_2: 
NetR29_1: R17.1 R18.2 | length 4.4
  Bottom Layer w1: R17.1 R18.2@62.544,41.035
New1: R11.1 R12.2 | length 5.2
  Bottom Layer w1: R11.1@37.144,53.989 R12.2
NewNet: 
NewNet2: R20.1 R21.2 | length 3.9
  Bottom Layer w1: R20.1 R21.2@62.036,71.642
Vin_AC: TB-2.1 TB-2.2 TB-4.1 | length 207.5
  Top Layer w4: TB-2.1 TB-2.2
  Mid-Layer 2 w2: TB-4.1@54.395,7.675 54.395,10.795 55.45,11.85 59.6,11.85 72.973,25.223 88.848,25.223 90.55,26.925 90.55,171.349 TB-2.1
pads on no net: K1.6 K2.6 K3.6 K4.6 K5.6 K6.6 K7.6 K8.6 K9.6 K10.6

## Keep-outs
Keep-Out Layer:
  lines w0.2: 0.175,-0.175 99.675,-0.175 100.175,0.325 100.175,4.575 ; 0.175,-0.15 0.175,188.375 100.006,188.375 100.006,187.194 100.006,182.569 100.175,182.4 100.175,4.575 ; 100.175,4.575 100.175,4.575

## Silkscreen, mask and mechanical layers (free items; w line width, h text height)
Top Overlay:
  lines w0.2: 0.06,4.586 0.06,0.115 0.175,0 99.7,0 100.136,0.436 100.136,4.586 ; 0.375,188.3 100.15,188.3 ; 35.55,5.375 36.725,5.375 ; 40.35,5 41.525,5 ; 41.1,4.35 41.1,5.6
  lines w0.254: 0.06,-3.034 0.06,-2.526 ; 0.06,4.586 0.06,188.15 ; 1.584,-3.288 0.06,-2.78 ; 1.584,-2.272 0.06,-2.78 ; 44.321,-2.78 0.06,-2.78 ; 55.799,-2.78 100.06,-2.78 ; 98.536,-3.288 100.06,-2.78 ; 98.536,-2.272 100.06,-2.78 ; 100.06,-3.034 100.06,-2.526 ; 100.136,4.586 100.136,188.3 ; 110.396,186.525 110.9,188.05 ; 110.646,188.049 111.154,188.051 ; 110.938,1.173 111.45,-0.35 ; 111.15,102.382 110.9,188.05 ; 111.196,-0.351 111.704,-0.349 ; 111.2,85.318 111.45,-0.35 ; 111.412,186.527 110.9,188.05 ; 111.954,1.175 111.45,-0.35
  text "©OpenStrom licensed under CC-BY-SA" at 4.8,185.6 h2.54
  text "Rev.3" at 50.35,185.35 h2.54
  text "188.401 (mm)" at 110.237,102.125 h1.52 r270.17
  text "+V~" at 62.3,3.7 h1.32
  text "-V~" at 67.925,3.675 h1.32
  text "DC" at 37.325,2.9 h1.52
  text "AC" at 65.475,1.575 h1.52
  text "100 (mm)" at 44.575,-3.694 h1.52